# Altium PCB PCB1.PcbDoc
Units mm, origin at the board's own origin, x right, y up, seen from the top; angles counter-clockwise.
Board outline 79.76 x 79.63 mm, 2 copper layers (Top Layer, Bottom Layer); 33 components, 26 nets, 164 pads, 11 vias.
Unrouted connection lines stored in the file: 1.
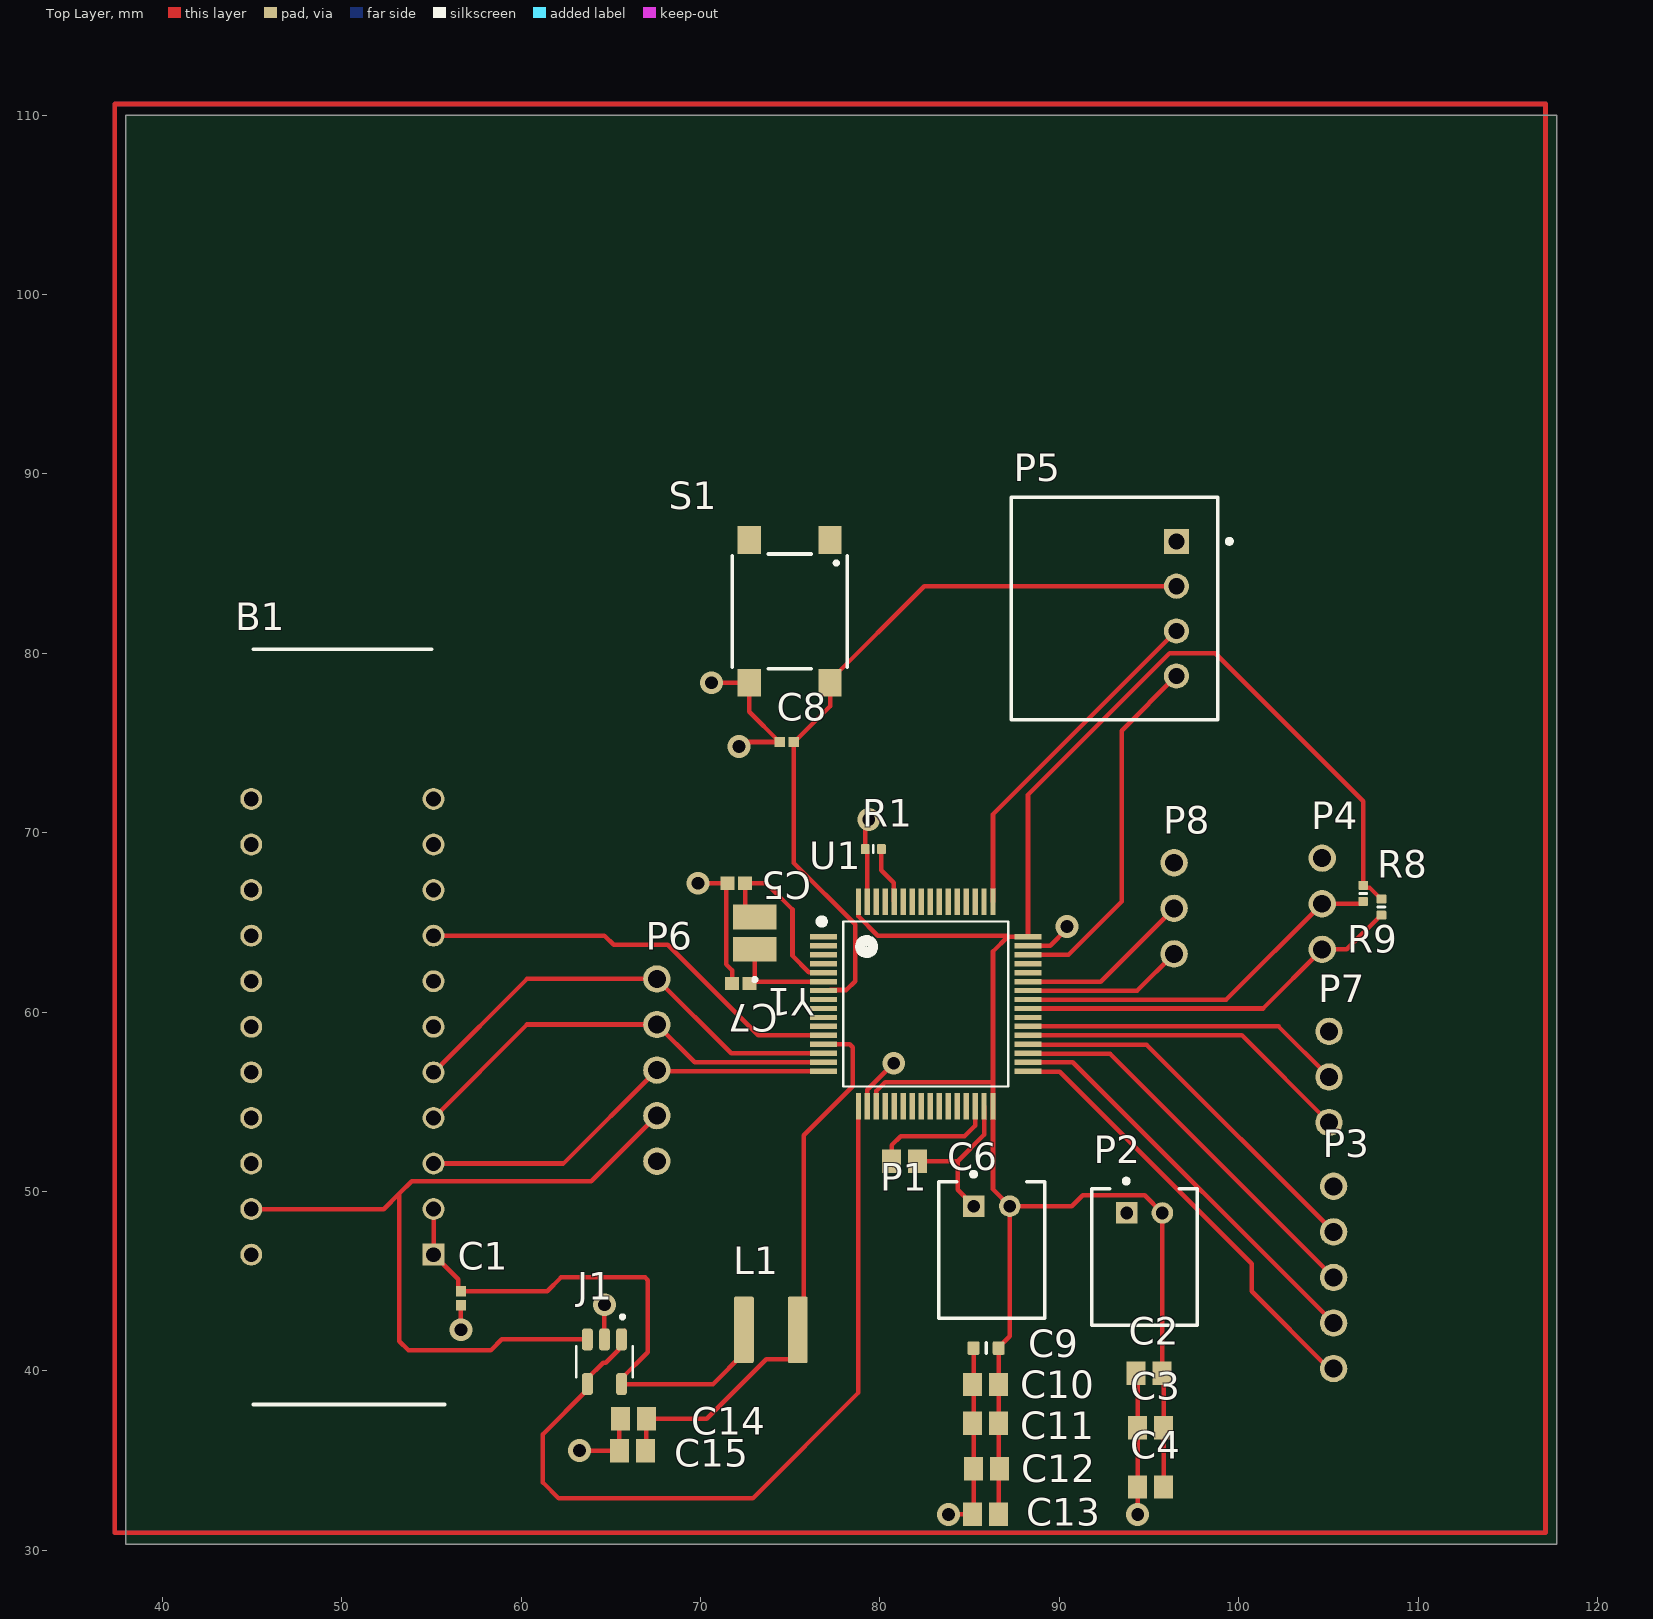
[diagram p0: Top Layer view]
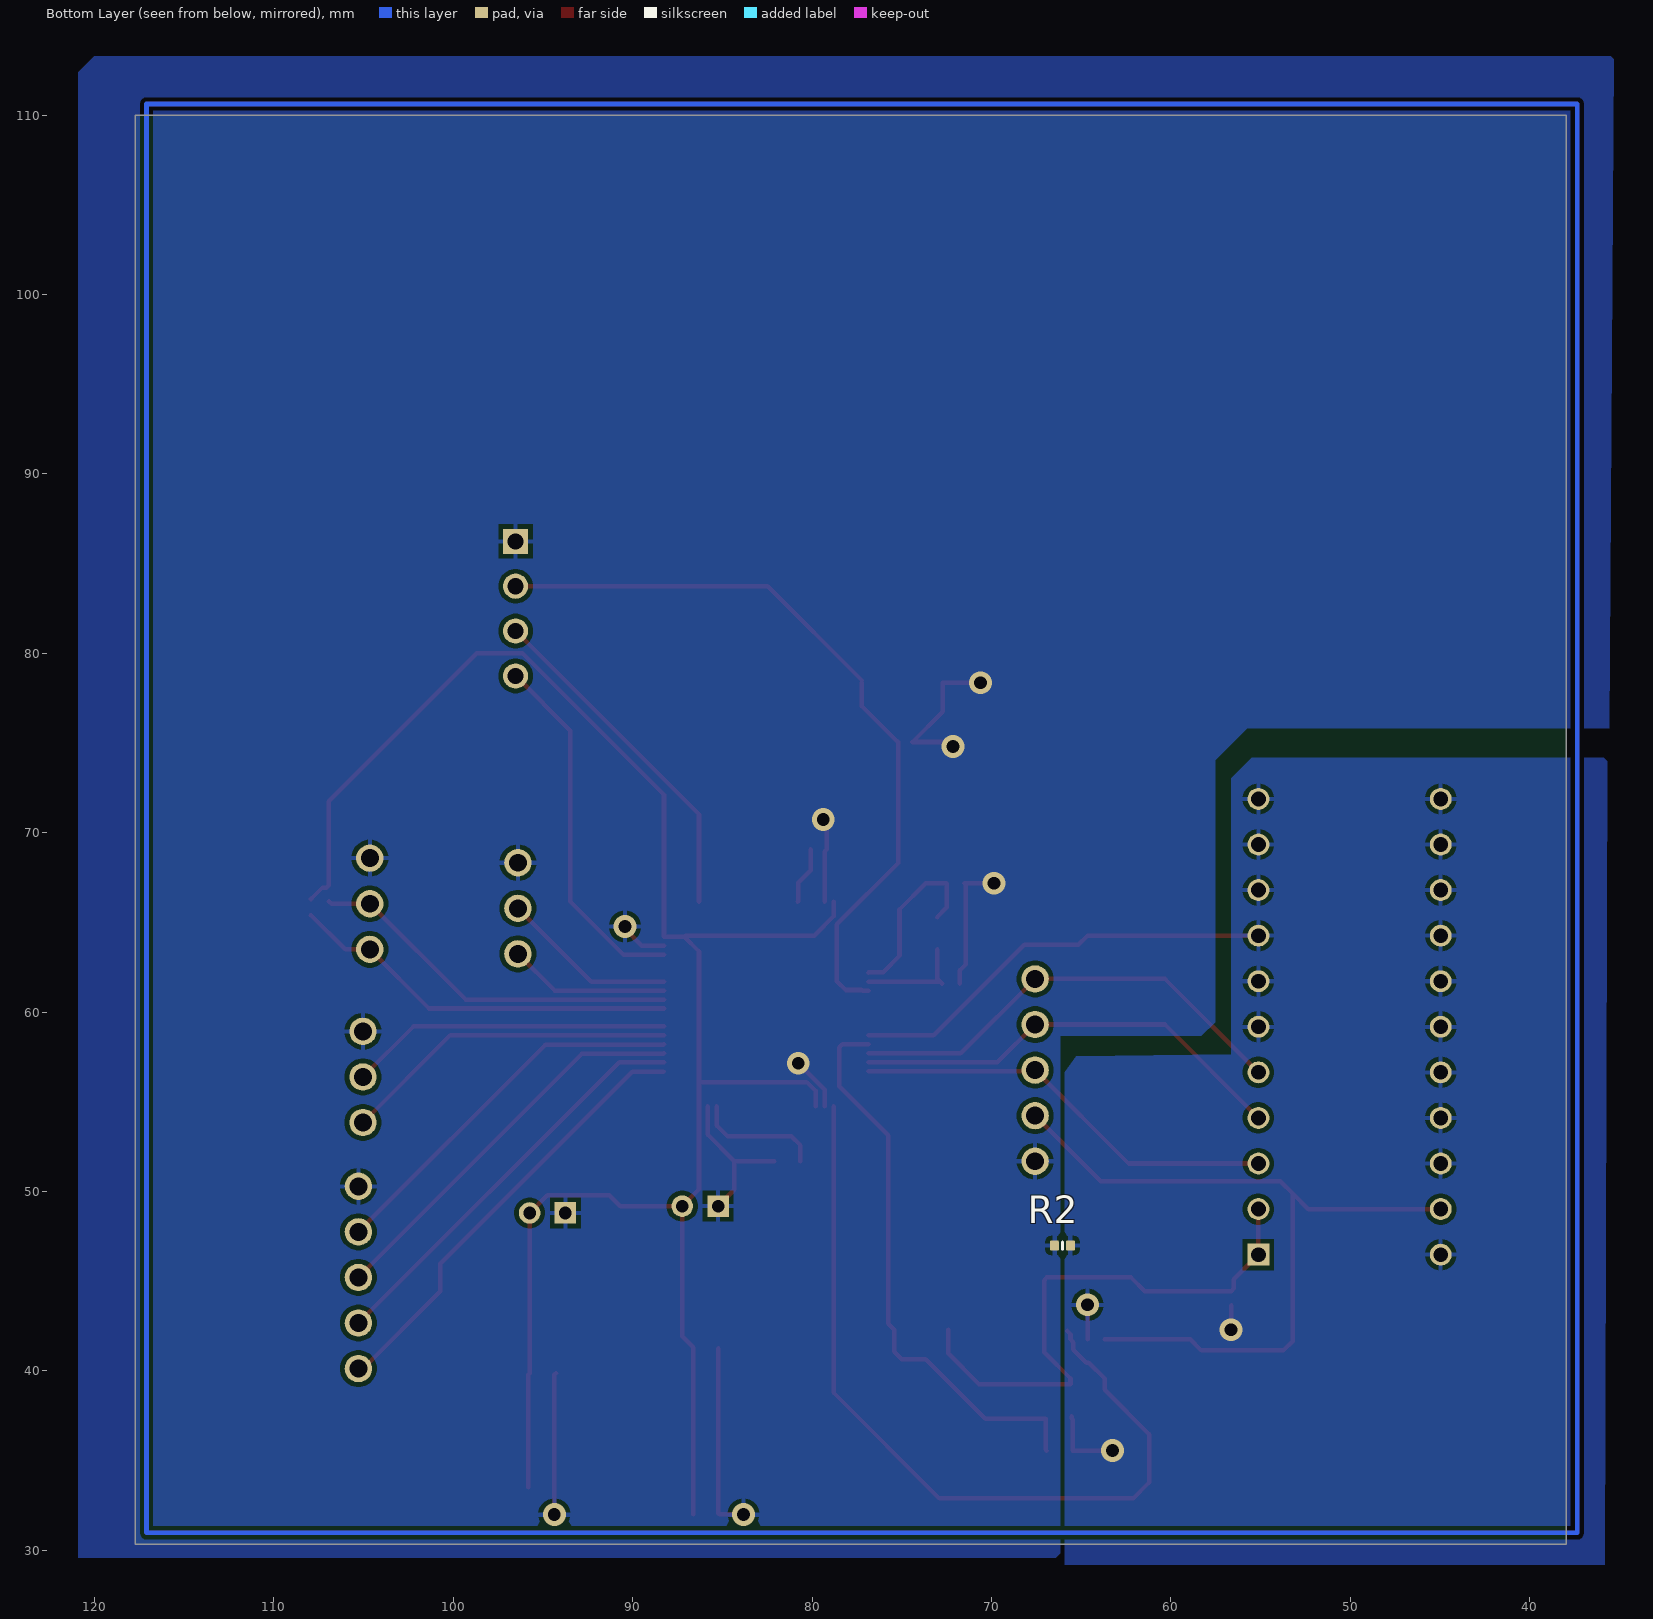
[diagram p1: Bottom Layer view, seen from below]
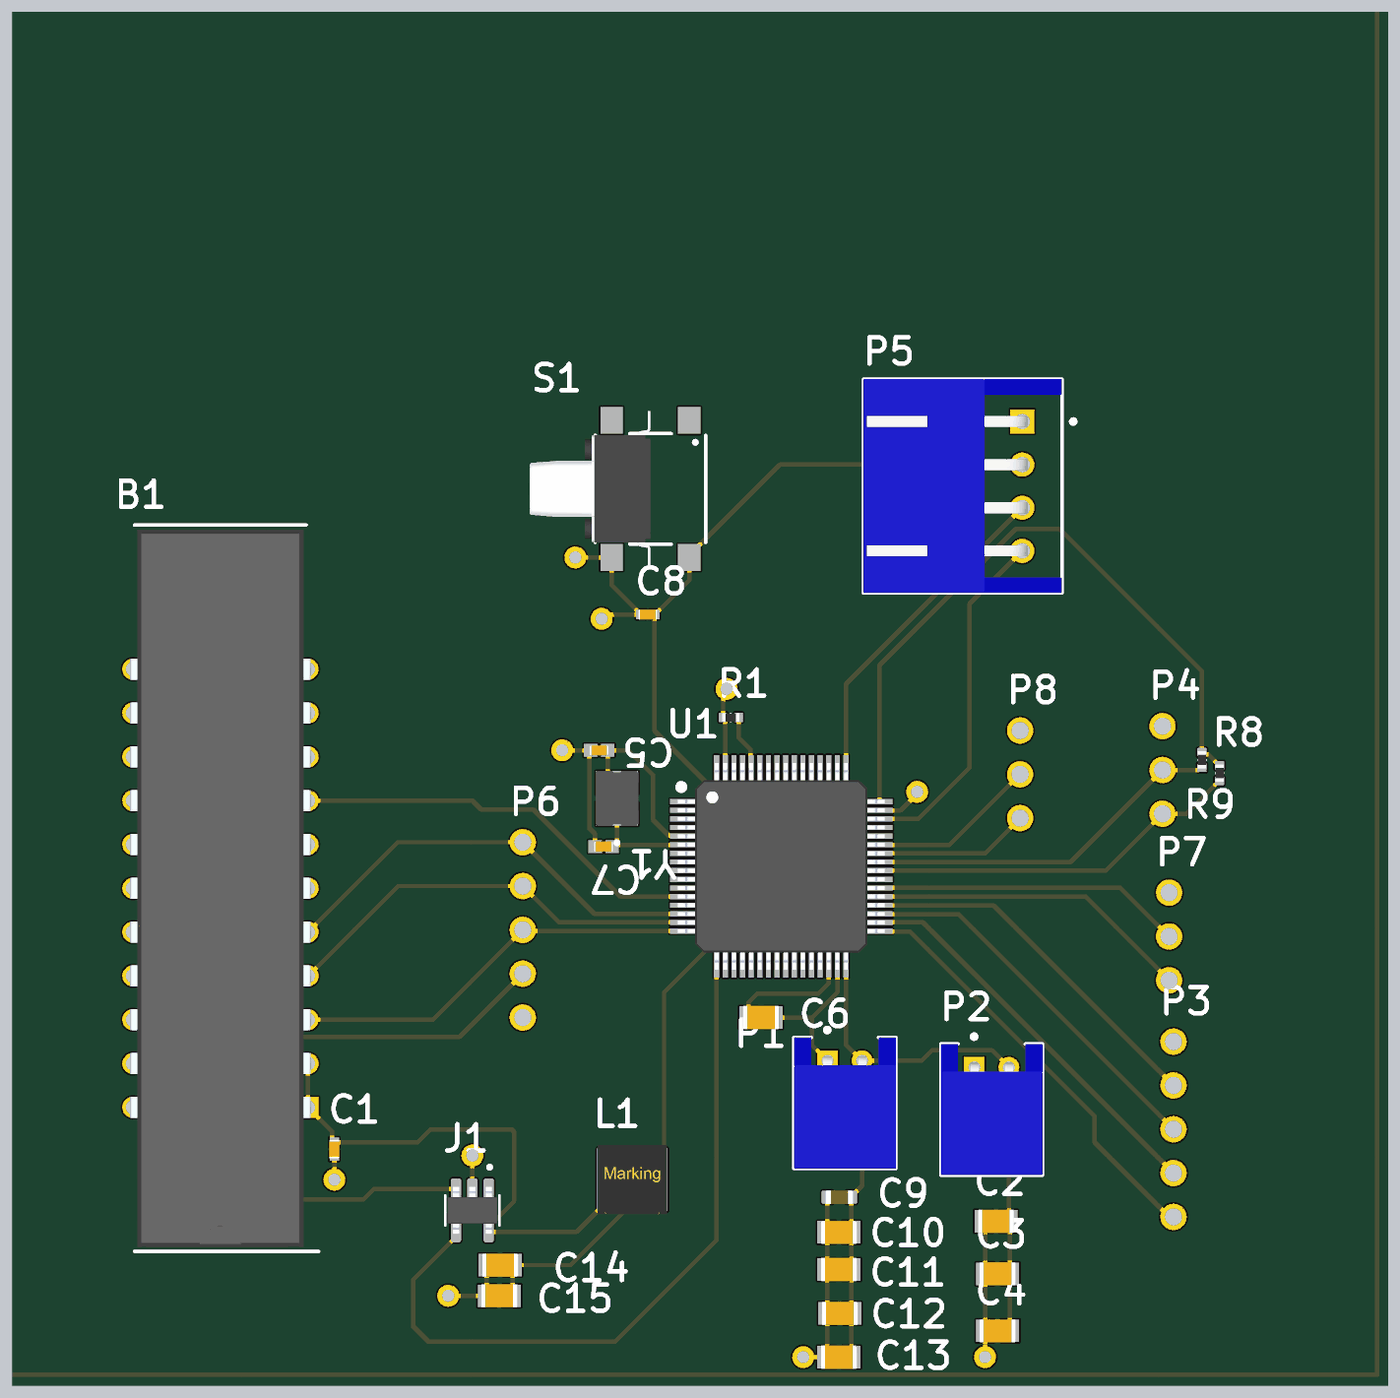
[diagram p2: 3D render of the assembled board from above, using the file's embedded part models]

## Layer stack, top to bottom
Top Solder: solder mask 0.0102, Solder Resist, Dk 3.5
Top Layer: signal copper 0.0356
Dielectric 1: dielectric 0.32, FR-4, Dk 4.8
Bottom Layer: signal copper 0.0356
Bottom Solder: solder mask 0.0102, Solder Resist, Dk 3.5

## Board outline
37.973,30.353 37.973,109.982 117.729,109.982 117.729,30.353

## Design rules (kind name [scope] priority, off if disabled: settings)
Clearance [All] p1 off: gap=0.254 ignorepadtopadclearanceinfootprint=FALSE
Clearance Clearance_1 [All] p2: gap=0.15 ignorepadtopadclearanceinfootprint=FALSE
PolygonConnect [All] p1: connectstyle=Relief reliefconductorwidth=0.254 reliefentries=4 polygonreliefangle="90 Angle" airgapwidth=0.254
RoutingVias [All] p1: holewidth=0.711 width=1.27 viastyle="Through Hole" minholewidth=0.711 minwidth=1.27 maxholewidth=0.711 maxwidth=1.27
SolderMaskExpansion [All] p1: expansion=0.102 istentingtop=FALSE
SupplyNets "Schematic Supply Nets_1" [InNet('AGND')] p1: voltage=0.000
SupplyNets "Schematic Supply Nets" [InNet('GND')] p2: voltage=0.000
Width Width_1 [All] p1: maxlimit=0.254 minlimit=0.2 preferedwidth=0.254 bottomlayer_minwidth=0.254 minimp=50.000000 maximp=50.000000 favimp=50.000000
Width [All] p2 off: maxlimit=0.254 minlimit=0.254 preferedwidth=0.254
30 further rules are at their usual default settings.

## Components (designator, comment, footprint, x,y, rotation, side; value= is the part's Value field where it differs from the comment)
B1 "TCD1304DG_8Z_AW_" DIP1016W62P254L4160H372Q22N 50.038,59.182 r180 top
C1 "Capacitor 0.1 uF +/- 5% 16 V 0402" CAPC1005X56X25LL10T15 56.642,44.06 r90 top value="10 uF"
C2 "Capacitor 100 nF +/-10% 50 V 0805" CAPC2013X95X50LL10T25 94.996,39.878 r180 top value="100 pF"
C3 "Capacitor 100 nF +/-10% 50 V 0805" CAPC2013X95X50LL10T25 95.086,36.83 r180 top value="100 nF"
C4 "Capacitor 100 nF +/-10% 50 V 0805" CAPC2013X95X50LL10T25 95.086,33.528 r180 top value="4.7 uF"
C5 "Capacitor 0.5 pF +/- 0.1pF 25 V 0402" CAPC1005X56X25ML10T15 71.991,67.183 r180 top value=20pF
C6 "Capacitor 100 nF +/-10% 50 V 0805" CAPC2013X95X50LL10T25 81.37,51.689 r0 top value="4.7 uF"
C7 "Capacitor 0.5 pF +/- 0.1pF 25 V 0402" CAPC1005X56X25ML10T15 72.245,61.595 r180 top value=20pF
C8 "Capacitor 0.1 uF +/- 5% 16 V 0402" CAPC1005X56X25LL10T15 74.812,75.057 r0 top value=100nF
C9 "Capacitor 4.7µF +/-20% 10V 0603" CAPC0603(1608)100_L 85.914,41.275 r0 top value=4.7µF
C10 "Capacitor 100 nF +/-10% 50 V 0805" CAPC2013X95X50LL10T25 85.889,39.243 r0 top value=100nF
C11 "Capacitor 100 nF +/-10% 50 V 0805" CAPC2013X95X50LL10T25 85.889,37.084 r0 top value=100nF
C12 "Capacitor 100 nF +/-10% 50 V 0805" CAPC2013X95X50LL10T25 85.942,34.544 r0 top value=100nF
C13 "Capacitor 100 nF +/-10% 50 V 0805" CAPC2013X95X50LL10T25 85.889,32.004 r0 top value=100nF
C14 "Capacitor 100 nF +/-10% 50 V 0805" CAPC2013X95X50LL10T25 66.257,37.338 r0 top value=100nF
C15 "Capacitor 100 nF +/-10% 50 V 0805" CAPC2013X95X50LL10T25 66.204,35.56 r0 top value=4.7uF
J1 "MCP6001UT-E/OT" SOT95P280X145-5N 64.643,40.513 r270 top
L1 "74404042330" "WE-LQS 4018" 73.914,42.291 r180 top value=BEAD
P1 "" JST-S2B-PH-K-S_V 86.233,46.736 r0 top
P2 "" JST-S2B-PH-K-S_V 94.742,46.355 r0 top
P3 "5-POS-PIN" PCB_5POS_PIN 105.283,40.132 r0 top
P4 "" PCB_3POS_PIN 104.648,63.5 r0 top
P5 "" JST-S4B-XH-A(LF)(SN)_V 96.52,82.49 r270 top
P6 "" PCB_5POS_PIN 67.564,61.849 r180 top
P7 "" PCB_3POS_PIN 105.029,53.848 r0 top
P8 "" PCB_3POS_PIN 96.393,63.246 r0 top
R1 "10KR2F" RESC0402(1005)_L 79.629,69.088 r0 top value=10k
R2 "10KR2F" RESC0402(1005)_L 66.04,46.99 r180 bottom value=0
R8 "10KR2F" RESC0402(1005)_L 107.95,65.855 r270 top
R9 "10KR2F" RESC0402(1005)_L 106.934,66.617 r270 top
S1 "Switch" "430152070826 Switch" 74.966,82.334 r270 top
U1 "STM32F446RCT6TR" QFP50P1200X1200X160-64N 82.55,60.452 r0 top
Y1 "CG04874-8M" XTALDFN320X250X100-2N 73.025,64.4 r90 top

## Footprints (in the part's own frame and the unit in brackets; to place one, negate y for a bottom-side part, rotate by r counter-clockwise, add the part's x,y. Pads: shape width x height; smd on the part's side, far side on the other; paste and mask are expansions set on the pad)
"430152070826 Switch" [mm]
  rect 1.55x1.3 smd paste+0 mask+0.102: 1(-3.975,2.25) 2(-3.975,-2.25) 3(3.975,2.25) 4(3.975,-2.25)
  silkscreen extent -3.2,-3.2 3.2,3.2, body extent -4.5,-7 4.5,0, height 3.1
CAPC0603(1608)100_L [mm] "Chip Capacitor, Body 1.6x0.8mm, Height 1.0mm, IPC High Density"
  rrect25% 0.66x0.76 smd: 1(-0.7,0) 2(0.7,0)
  silkscreen extent 0,-0.3 0,0.3, body extent -0.8,-0.4 0.8,0.4, height 0.95
CAPC1005X56X25LL10T15 [mm] "Chip Capacitor, 2-Leads, Body 1.10x0.60mm, IPC High Density"
  rect 0.58x0.54 smd: 1(-0.39,0) 2(0.39,0)
  body extent -0.55,-0.3 0.55,0.3, height 0.56
CAPC1005X56X25ML10T15 [mm] "Chip Capacitor, 2-Leads, Body 1.10x0.60mm, IPC Low Density"
  rect 0.78x0.74 smd: 1(-0.49,0) 2(0.49,0)
  body extent -0.55,-0.3 0.55,0.3, height 0.56
CAPC2013X95X50LL10T25 [mm] "Chip Capacitor, 2-Leads, Body 2.10x1.35mm, IPC High Density"
  rect 1.05x1.3 smd: 1(-0.725,0) 2(0.725,0)
  body extent -1.05,-0.67 1.05,0.67, height 0.95
DIP1016W62P254L4160H372Q22N [mm]
  rect 1.22x1.22 / inner round 1.22 / far side rect 1.22x1.22 hole 0.82: 1(-5.08,12.7)
  round 1.22 hole 0.82: 2(-5.08,10.16) 3(-5.08,7.62) 4(-5.08,5.08) 5(-5.08,2.54) 6(-5.08,0) 7(-5.08,-2.54) 8(-5.08,-5.08) 9(-5.08,-7.62) 10(-5.08,-10.16) 11(-5.08,-12.7) 12(5.08,-12.7) 13(5.08,-10.16) 14(5.08,-7.62) 15(5.08,-5.08) 16(5.08,-2.54) 17(5.08,0) 18(5.08,2.54) 19(5.08,5.08) 20(5.08,7.62) 21(5.08,10.16) 22(5.08,12.7)
  silkscreen extent -5.69,-21.05 4.97,21.05, body extent -5.24,-20.8 5.24,20.8, height 3.72
JST-S2B-PH-K-S_V [mm] "THD, 2-Leads, Body 7.6x5.9mm, Pitch 2mm"
  rect 1.2x1.2 hole 0.7: 1(-1,2.45)
  round 1.2 hole 0.7: 2(1,2.45)
  silkscreen extent -2.95,-3.8 2.95,4.35, body extent -2.95,-3.8 2.95,3.8, height 4.8
JST-S4B-XH-A(LF)(SN)_V [mm] "Header, 4-Leads, Body 12.4x11.5mm, Pitch 2.5mm"
  rect 1.4x1.4 hole 0.9: 1(-3.75,0)
  round 1.4 hole 0.9: 2(-1.25,0) 3(1.25,0) 4(3.75,0)
  silkscreen extent -6.2,-9.2 6.2,3.08, body extent -6.2,-9.2 6.2,2.3, height 6.15
PCB_3POS_PIN [mil]
  round 60 hole 39.37: 1(0,0) 2(0,100) 3(0,200)
PCB_5POS_PIN [mil]
  round 60 hole 39.37: 1(0,0) 2(0,100) 3(0,200) 4(0,300) 5(0,400)
QFP50P1200X1200X160-64N [mm]
  rect 1.5x0.3 smd: 1(-5.7,3.75) 2(-5.7,3.25) 3(-5.7,2.75) 4(-5.7,2.25) 5(-5.7,1.75) 6(-5.7,1.25) 7(-5.7,0.75) 8(-5.7,0.25) 9(-5.7,-0.25) 10(-5.7,-0.75) 11(-5.7,-1.25) 12(-5.7,-1.75) 13(-5.7,-2.25) 14(-5.7,-2.75) 15(-5.7,-3.25) 16(-5.7,-3.75) 33(5.7,-3.75) 34(5.7,-3.25) 35(5.7,-2.75) 36(5.7,-2.25) 37(5.7,-1.75) 38(5.7,-1.25) 39(5.7,-0.75) 40(5.7,-0.25) 41(5.7,0.25) 42(5.7,0.75) 43(5.7,1.25) 44(5.7,1.75) 45(5.7,2.25) 46(5.7,2.75) 47(5.7,3.25) 48(5.7,3.75)
  rect 0.3x1.5 smd: 17(-3.75,-5.7) 18(-3.25,-5.7) 19(-2.75,-5.7) 20(-2.25,-5.7) 21(-1.75,-5.7) 22(-1.25,-5.7) 23(-0.75,-5.7) 24(-0.25,-5.7) 25(0.25,-5.7) 26(0.75,-5.7) 27(1.25,-5.7) 28(1.75,-5.7) 29(2.25,-5.7) 30(2.75,-5.7) 31(3.25,-5.7) 32(3.75,-5.7) 49(3.75,5.7) 50(3.25,5.7) 51(2.75,5.7) 52(2.25,5.7) 53(1.75,5.7) 54(1.25,5.7) 55(0.75,5.7) 56(0.25,5.7) 57(-0.25,5.7) 58(-0.75,5.7) 59(-1.25,5.7) 60(-1.75,5.7) 61(-2.25,5.7) 62(-2.75,5.7) 63(-3.25,5.7) 64(-3.75,5.7)
  silkscreen extent -6.08,-4.6 4.6,4.88, body extent -6,-6 6,6, height 1.6
RESC0402(1005)_L [mm] "Chip Resistor, Body 1.0x0.5mm, IPC High Density"
  rrect25% 0.5x0.55 smd: 1(-0.45,0) 2(0.45,0)
  silkscreen extent 0,-0.2 0,0.2, body extent -0.5,-0.25 0.5,0.25, height 0.3
SOT95P280X145-5N [mm]
  rrect50% 1.22x0.6 smd: 1(-1.245,0.95) 2(-1.245,0) 3(-1.245,-0.95) 4(1.245,-0.95) 5(1.245,0.95)
  silkscreen extent -2.6,-1.57 0.88,1.57, body extent -1.35,-1.45 1.35,1.45, height 1.45
"WE-LQS 4018" [mm] "SMD Power Inductor, 2-Leads, Body 4.0x4.0mm"
  rrect15% 1.1x3.7 smd: 1(-1.5,0) 2(1.5,0)
  body extent -2,-2 2,2, height 1.78
XTALDFN320X250X100-2N [mm]
  rect 1.37x2.43 smd: 1(-0.9,0) 2(0.9,0)
  silkscreen extent -2.68,-0.1 -2.49,0.1, body extent -1.6,-1.25 1.6,1.25, height 1

## Part data
B1: "Image Sensors & Color Sensors CCD Linear Sensor 3648 8x20 54mm", Manufacturer_Name=Toshiba, Manufacturer_Part_Number=TCD1304DG(8Z,AW), Mouser Part Number=757-TCD1304DG8ZAW, Datasheet Link=https://datasheet.datasheetarchive.com/originals/distributors/DKDS-29/569259.pdf, Geometry.Height=3.72mm, Mouser Price/Stock=https://www.mouser.co.uk/ProductDetail/Toshiba/TCD1304DG8ZAW?qs=OLJpxlzHOSRVMcyirxbASw%3D%3D
C1 C8: library part CMP-001-00001-6, "Chip Capacitor, 0.1 uF, +/- 5%, 16 V, 0402 (1005 Metric)", Capacitor Type=Ceramic, Case/Package=0402, Max Operating Temperature=125°C, Min Operating Temperature=-55°C, Tolerance=5%, Voltage Rating=16V, Mounting Technology=SM, Pins=2, RoHS Compliant=True
C2 C3 C4 C6 C10 C11 C12 C13 C14 C15: library part CMP-001-00018-6, "Chip Capacitor, 100 nF, +/- 10%, 50 V, 0805 (2012 Metric)", Capacitor Type=Ceramic, Case/Package=0805, Max Operating Temperature=125°C, Min Operating Temperature=-55°C, Tolerance=10%, Voltage Rating=50V, Mounting Technology=SM, Pins=2, RoHS Compliant=True
C5 C7: library part CMP-001-00002-6, "Chip Capacitor, 0.5 pF, +/- 0.1pF, 25 V, 0402 (1005 Metric)", Capacitor Type=Ceramic, Case/Package=0402, Max Operating Temperature=125°C, Min Operating Temperature=-55°C, Tolerance=20%, Voltage Rating=25V, Mounting Technology=SM, Pins=2, RoHS Compliant=True
C9: library part CMP-001-00076-4, "Chip Capacitor, 4.7µF +/-20%, 10V, 0603, Thickness 1 mm", Case/Package=0603, Max Operating Temperature=85°C, Min Operating Temperature=-55°C, Tolerance=10%, Voltage Rating=10V, Mounting Technology=SMT, Pins=2
J1: "Microchip MCP6001UT-E/OT Op Amp, 1MHz Rail-Rail, 1.8 - 6 V, 5-Pin SOT-23", Package="SOT-23 Microchip", Check_prices=https://www.snapeda.com/parts/MCP6001UT-E/OT/Microchip/view-part/?ref=eda, MF=Microchip, MP=MCP6001UT-E/OT, SnapEDA_Link=https://www.snapeda.com/parts/MCP6001UT-E/OT/Microchip/view-part/?ref=snap
L1: library part CMP-006-00018-3, "WE-LQS SMD Power Inductor, L=33 µH", Tolerance=20%, ComponentLink1Description="Manufacturer URL", ComponentLink1URL=http://www.we-online.com, ComponentLink2Description=Datasheet, ComponentLink2URL=http://katalog.we-online.de/pbs/datasheet/74404042330.pdf, Pins=2
P1 P2: library part CMP-002-00030-2, "Male Header, Pitch 2 mm, 1 x 2 Position, Height 4.8 mm, Tail Length 3.4 mm, -25 to 85 degC, RoHS, Bulk", Case/Package=S2B-PH-K-S, Manufacturer="Japan Solderless Terminals", Max Operating Temperature=85°C, Min Operating Temperature=-25°C, Package Description="Male Header, Pitch 2 mm, 1 x 2 Position, Height 4.8 mm, Tail Length 3.4 mm", Connector Type=Header, Datasheet URL=http://www.jst-mfg.com/product/pdf/eng/ePH.pdf, Datasheet Version=Dec-12, Gender=Male, Mounting Technology=SM, Package Reference=S2B-PH-K-S, RoHS Compliant=Unknown
P4 P7 P8: library part 3-POS-PIN
P5: library part CMP-002-00034-2, "Male Header, Pitch 2.5 mm, 1 x 4 Position, Height 6.1 mm, Tail Length 3.4 mm, -25 to 85 degC, RoHS, Bulk", Case/Package=S4B-XH-A(LF)(SN), Manufacturer=JST, Max Operating Temperature=85°C, Min Operating Temperature=-25°C, Package Description="XH Series Disconnectable Crimp Style Connector, Pitch 2.5 mm, 1 x 4 Position, Height 6.1 mm, Tail Length 3.4 mm", Connector Type=Header, Datasheet URL=http://www.jst-mfg.com/product/pdf/eng/eXH.pdf, Datasheet Version=May-16, Gender=Male, Manufacturer URL=http://www.jst.com/home2.html, Mounting Technology=TH, Package Reference=S4B-XH-A(LF)(SN), RoHS Compliant=Unknown
P6: library part 5-POS-PIN
R1 R2 R8 R9: library part CMP-009-00066-2, "10K 0.063W 1% 0402 (1005 Metric)  SMD", Case/Package=0402, Power=63mW, Tolerance=1%, Mounting Technology=SMT, Pins=2
S1: "Tactile Switch SPST-NO Top Actuated Surface Mount", Package=None, Check_prices=https://www.snapeda.com/parts/430152070826/W%25C3%25BCrth+Elektronik+Midcom/view-part/?ref=eda, MF="WÃ¼rth Elektronik", MP=430152070826, SnapEDA_Link=https://www.snapeda.com/parts/430152070826/W%25C3%25BCrth+Elektronik+Midcom/view-part/?ref=snap
U1: "ARM Cortex-M4 STM32F4 Microcontroller IC 32-Bit Single-Core 180MHz 256KB (256K x 8) FLASH 64-LQFP (10x10)", Package="LQFP-64 STMicroelectronics", Check_prices=https://www.snapeda.com/parts/STM32F446RCT6TR/STMicroelectronics/view-part/?ref=eda, MF=STMicroelectronics, MP=STM32F446RCT6TR, SnapEDA_Link=https://www.snapeda.com/parts/STM32F446RCT6TR/STMicroelectronics/view-part/?ref=snap
Y1: "8 MHz ±20ppm Crystal 8pF 500 Ohms 2-SMD, No Lead", Package="SMD-2 NDK America,", Check_prices=https://www.snapeda.com/parts/CG04874-8M/NDK+America%252C+Inc./view-part/?ref=eda, MF="NDK America, Inc.", MP=CG04874-8M, SnapEDA_Link=https://www.snapeda.com/parts/CG04874-8M/NDK+America%252C+Inc./view-part/?ref=snap

## Via types
v1: diameter 1.27, hole 0.711, Top Layer to Bottom Layer, 11 vias

## Nets (pads, with @x,y where several pads share a name; then routed paths per layer and width w, separated by ;. In a path a pad name is that pad's centre, name@x,y a point inside that pad or via, vN(x,y) a via of type N, cw(c..) or ccw(c..) an arc to the next point about the centre after c; other vN are vias at no path point)
AGND: B1.6 B1.7 B1.8 B1.9 B1.10 B1.11 B1.12 B1.13 B1.14 B1.15 B1.16 B1.17 B1.18 B1.19 B1.20 B1.22 C1.1 C14.1 C15.1 J1.2 R2.2 U1.12 | length 31.5
  Top Layer w0.254: B1.8 64.643,64.262 65.151,63.754 68.163,63.754 73.215,58.702 U1.12 ; v1(56.642,42.291) C1.1 ; v1(63.246,35.56) C15.1 65.479,37.285 C14.1 C14.1@65.532,37.463 ; J1.2 v1(64.643,43.688)
BOOT0: R1.2 U1.60 | length 3.2
  Top Layer w0.254: R1.2 80.079,67.907 80.769,67.217 80.769,66.183 U1.60
fM: B1.4 P6.2 U1.15 | length 24.8
  Top Layer w0.254: B1.4 60.325,59.309 P6.2 69.671,57.202 U1.15
GND: C2.2 C3.2 C4.2 C5.2 C6.2 C7.2 C8.1 C9.1 C10.1 C11.1 C12.1 C13.1 P1.1 P2.1 P3.5 P4.3 P5.1 P6.5 P7.3 P8.3 R1.1 R2.1 S1.4 U1.18 U1.31 U1.47 U1.63 | length 53.7
  Top Layer w0.254: v1(69.85,67.183) C5.2 71.429,67.111 71.429,62.657 71.755,62.331 C7.2 ; v1(70.612,78.359) S1.4 72.716,76.743 74.402,75.057 C8.1 72.39,75.057 v1(72.136,74.803) ; U1.18 79.3,55.678 v1(80.772,57.15) ; U1.63 79.3,68.967 R1.1 79.179,70.543 v1(79.375,70.739) ; C6.2 84.328,51.689 ; v1(83.82,32.004) C13.1 85.214,32.054 C9.1 ; P1.1 84.328,50.091 84.328,51.689 ; U1.31 85.8,53.161 84.328,51.689 ; U1.47 89.483,63.702 90.424,64.643 v1(90.424,64.77) ; C2.2 94.361,39.788 C3.2 C4.2 v1(94.361,32.004)
ICG: B1.3 P6.3 U1.16 | length 23.9
  Top Layer w0.254: B1.3 62.357,51.562 P6.3 67.631,56.702 U1.16
MISO: P3.3 U1.35 | length 22.2
  Top Layer w0.254: U1.35 88.281,57.671 92.824,57.671 P3.3
MOSI: P3.4 U1.36 | length 21.4
  Top Layer w0.254: U1.36 88.281,58.171 94.864,58.171 P3.4
NetC6_1: C6.1 U1.30 | length 7.1
  Top Layer w0.254: C6.1 80.645,52.578 81.153,53.086 84.709,53.086 85.3,53.677 U1.30
NRST: C8.2 P5.2 S1.3 U1.7 | length 42.3
  Top Layer w0.254: C8.2 75.202,68.311 78.613,64.9 78.613,61.722 78.124,61.233 77.235,61.233 77.204,61.202 U1.7 ; C8.2@75.222,75.057 77.216,77.051 S1.3 ; S1.3@77.216,78.484 82.472,83.74 P5.2
NSS: P3.1 U1.33 | length 24.8
  Top Layer w0.254: U1.33@88.265,56.671 90.014,56.671 100.711,45.974 100.711,44.45 105.029,40.132 P3.1
OS: B1.21 J1.3 P6.4 | length 43.9
  Top Layer w0.254: B1.21 52.346,49.022 53.213,49.889 ; J1.3 58.926,41.758 58.316,41.148 53.721,41.148 53.213,41.656 53.213,49.889 ; P6.4 63.906,50.571 53.895,50.571 53.213,49.889
OSC1: C5.1 U1.5 Y1.2 | length 10.1
  Top Layer w0.254: Y1.2 72.481,65.844 C5.1 73.66,67.183 75.123,65.72 75.123,63.137 76.035,62.225 76.827,62.225 U1.5
OSC2: C7.1 U1.6 Y1.1 | length 6.2
  Top Layer w0.254: C7.1 72.842,61.702 U1.6 ; C7.1@72.755,61.595 73.025,61.865 Y1.1
OUT: J1.1 J1.4 U1.17 | length 46.8
  Top Layer w0.254: J1.1@65.764,42.226 65.593,42.055 J1.1 65.434,41.599 65.434,41.188 64.708,40.463 64.578,40.463 63.693,39.578 J1.4 63.693,38.958 61.214,36.479 61.214,33.782 62.103,32.893 72.898,32.893 78.8,38.795 U1.17
RX_D: P7.2 U1.38 | length 17.9
  Top Layer w0.254: U1.38 102.215,59.202 P7.2
RX_P: P8.2 U1.43 | length 9.8
  Top Layer w0.254: U1.43 92.309,61.702 P8.2
SCL: P4.2 R9.2 U1.41 | length 20.9
  Top Layer w0.254: U1.41 99.31,60.702 P4.2 106.782,66.04 106.909,66.167 R9.2
SCLK: P3.2 U1.34 | length 23.1
  Top Layer w0.254: U1.34 90.753,57.202 P3.2
SDA: P4.1 R8.2 U1.40 | length 21.9
  Top Layer w0.254: U1.40 101.35,60.202 P4.1 106.02,63.5 107.925,65.405 R8.2
SH: B1.5 P6.1 U1.14 | length 25.6
  Top Layer w0.254: B1.5 60.325,61.849 P6.1 71.711,57.702 U1.14
SWCLK: P5.3 U1.49 | length 19.3
  Top Layer w0.254: U1.49 86.3,71.02 P5.3
SWDIO: P5.4 U1.46 | length 20.3
  Top Layer w0.254: U1.46 90.507,63.202 93.472,66.167 93.472,75.692 P5.4
TX_D: P7.1 U1.37 | length 18.8
  Top Layer w0.254: U1.37 100.175,58.702 P7.1
TX_P: P8.1 U1.42 | length 9
  Top Layer w0.254: U1.42 94.349,61.202 P8.1
VDD: B1.1 B1.2 C1.2 C2.1 C3.1 C4.1 C9.2 C10.2 C11.2 C12.2 C13.2 J1.5 L1.2 P1.2 P2.2 R8.1 R9.1 U1.19 U1.32 U1.48 U1.64 | length 146.5
  Top Layer w0.254: B1.2 B1.1 56.499,45.101 56.499,44.593 C1.2 61.458,44.45 62.22,45.212 66.907,45.212 67.056,45.063 67.056,41.041 65.593,39.578 J1.5 70.691,39.268 72.414,40.991 L1.2 ; U1.64 78.8,65.345 79.883,64.262 87.062,64.262 87.122,64.202 ; U1.19 79.8,55.607 80.296,56.102 86.268,56.102 86.3,56.134 ; C13.2 C11.2 C10.2 C9.2 86.614,41.325 87.233,41.944 P1.2 ; C4.1 C3.1 95.811,39.788 C2.1 95.742,39.899 P2.2 94.761,49.786 91.297,49.786 90.697,49.186 P1.2 ; R8.1 107.925,66.305 107.286,66.944 107.057,66.944 R9.1 106.934,71.755 98.679,80.01 96.139,80.01 88.25,72.121 U1.48 87.122,64.202 ; 86.3,56.134 86.3,63.38 87.122,64.202 ; 86.3,56.134 U1.32 86.3,50.119 P1.2
VDDA: C14.2 C15.2 L1.1 U1.13 | length 31.7
  Top Layer w0.254: C15.2 66.982,35.613 C14.2 70.351,37.338 73.664,40.651 74.991,40.651 75.414,41.074 L1.1 75.755,42.632 75.755,53.145 78.486,55.877 78.486,58.039 78.323,58.202 U1.13
pads on no net: S1.1 S1.2 U1.1 U1.2 U1.3 U1.4 U1.8 U1.9 U1.10 U1.11 U1.20 U1.21 U1.22 U1.23 U1.24 U1.25 U1.26 U1.27 U1.28 U1.29 U1.39 U1.44 U1.45 U1.50 U1.51 U1.52 U1.53 U1.54 U1.55 U1.56 U1.57 U1.58 U1.59 U1.61 U1.62

## Polygon pours and split planes (outlines as drawn)
GND on Bottom Layer "GND_L02_P005" (solid, pour order 5): 35.56,75.819 55.753,75.819 57.531,74.041 57.531,59.436 58.293,58.674 66.167,58.674 66.167,29.845 66.421,29.591 120.904,29.591 120.904,112.395 120.015,113.284 35.306,113.284
AGND on Bottom Layer "AGND_L02_P002" (solid, pour order 2): 35.687,74.168 55.499,74.168 56.642,73.025 56.642,57.658 65.278,57.531 65.913,56.642 65.913,56.388 65.913,29.21 35.814,29.21

## Other copper
Multi-Layer:
  lines w0.254: 37.338,30.988 117.094,30.988 117.094,110.617 37.338,110.617 37.338,30.988